# EAGLE board 555 (EAGLE 6.5.0)
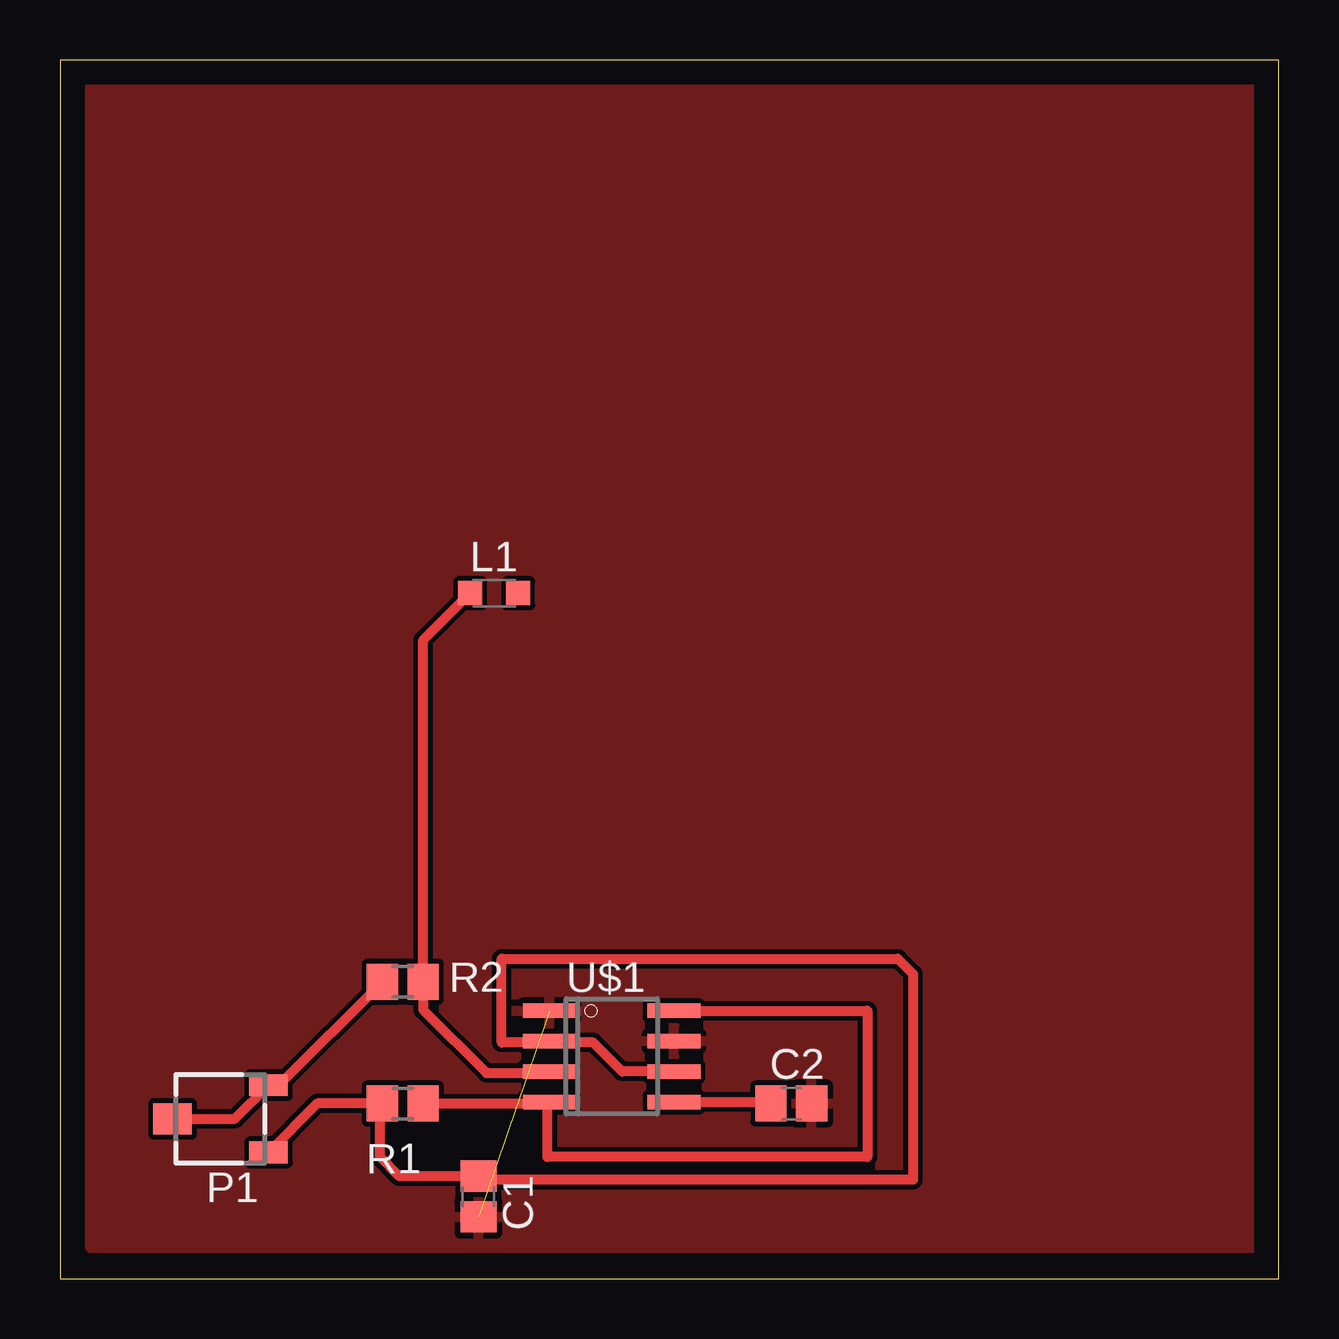
[diagram p0: board, top side]

Size 50.8 x 50.8 mm. Coordinates in mm from the lower left corner, seen from the top.
Outline: 0,0 50.8,0 50.8,50.8 0,50.8 0,0
Copper layers (1*16): Top 0.035mm / dielectric 1.5mm / Bottom 0.035mm
Design rules "default": minimum track width 10mil, minimum drill 24mil, track to track 8mil, track to pad 8mil, pad to pad 8mil, via to via 8mil, smd to smd 8mil, copper to edge 40mil, drill to drill 8mil, minimum pad ring 10mil, minimum via ring 8mil, stop-mask expansion 4mil, vias tented up to drill 0mil, thermal gap 10mil

## Footprints (pad centres in the part's own frame; a part is rotated, then mirrored left to right if it is on the bottom)
C0805 = smd 1.3 x 1.5: 1 -0.85,0; 2 0.85,0
L2012C = smd 1 x 1: 1 -1,0; 2 1,0
3223J = smd 1.6 x 0.9: 1 -2,1.4; 3 -2,-1.4 | smd 1.6 x 1.3: 2 2,0
R0805 = smd 1.3 x 1.5: 1 -0.85,0; 2 0.85,0
TLC555CRD = smd 0.6 x 2.2: 1 -1.555,-2.95; 2 -0.285,-2.95; 3 0.985,-2.95; 4 2.255,-2.95; 5 2.255,2.25; 6 0.985,2.25; 7 -0.285,2.25; 8 -1.555,2.25

## Placement (x,y rotation side)
C1  2.2nF  [C0805]  17.44,3.43 270 top
C2  0.01uF  [C0805]  30.48,7.3 0 top
L1  [L2012C]  18.1,28.57 0 top
P1  1k  [3223J]  6.69,6.67 180 top
R1  100k  [R0805]  14.29,7.3 180 top
R2  1.8k  [R0805]  14.29,12.38 0 top
U$1  TLC555CDR  [TLC555CRD]  23.35,9.62 270 top

## Library data of the parts
C1 C2 L1 R1 R2 = resistor
P1 = potentiometer
U$1 = ece510_library

## Nets
GND: C1.2 C2.2 U$1.1 U$1.7
N$1: C1.1 P1.1 R1.2 U$1.2 U$1.6
N$2: L1.1 R2.2 U$1.3
N$3: P1.2 P1.3 R2.1
N$7: C2.1 U$1.5
VCC: R1.1 U$1.4 U$1.8

## Tracks (layer width: path | path; a pad name or v marks a point on that pad's centre or on a via)
GND  (1 unrouted)
  pour Top: 0,76.2 74.93,76.2 74.93,1.27 1.27,1.27
N$1
  Top 0.406: U$1.6 23.43,8.63 22.23,9.84 20.46,9.84 | 20.46,9.84 U$1.2 | P1.1 10.72,7.3 R1.2 13.34,7.2 13.34,5.08 14.14,4.28 C1.1 17.59,4.13 35.56,4.13 35.56,12.7 34.92,13.34 18.41,13.34 18.41,9.84 20.46,9.84
N$2
  Top 0.406: U$1.3 20.34,8.57 17.78,8.57 15.14,11.21 R2.2 15.14,26.61 L1.1
N$3
  Top 0.406: P1.2 7.29,6.67 P1.3 9.12,8.07 R2.1
N$7
  Top 0.406: U$1.5 29.63,7.36 C2.1
VCC
  Top 0.406: U$1.8 33.66,11.17 33.66,5.08 20.32,5.08 20.32,7.29 | 20.32,7.29 U$1.4 | 20.32,7.29 15.15,7.29 R1.1